# Altium PCB Keypadmacro.PcbDoc
Units mm, origin at the board's own origin, x right, y up, seen from the top; angles counter-clockwise.
Board outline 70 x 90 mm, 2 copper layers (F.Cu, B.Cu), stack 1.671 mm thick; 114 components, 136 nets, 512 pads, 5 vias.
Unrouted connection lines stored in the file: 245.
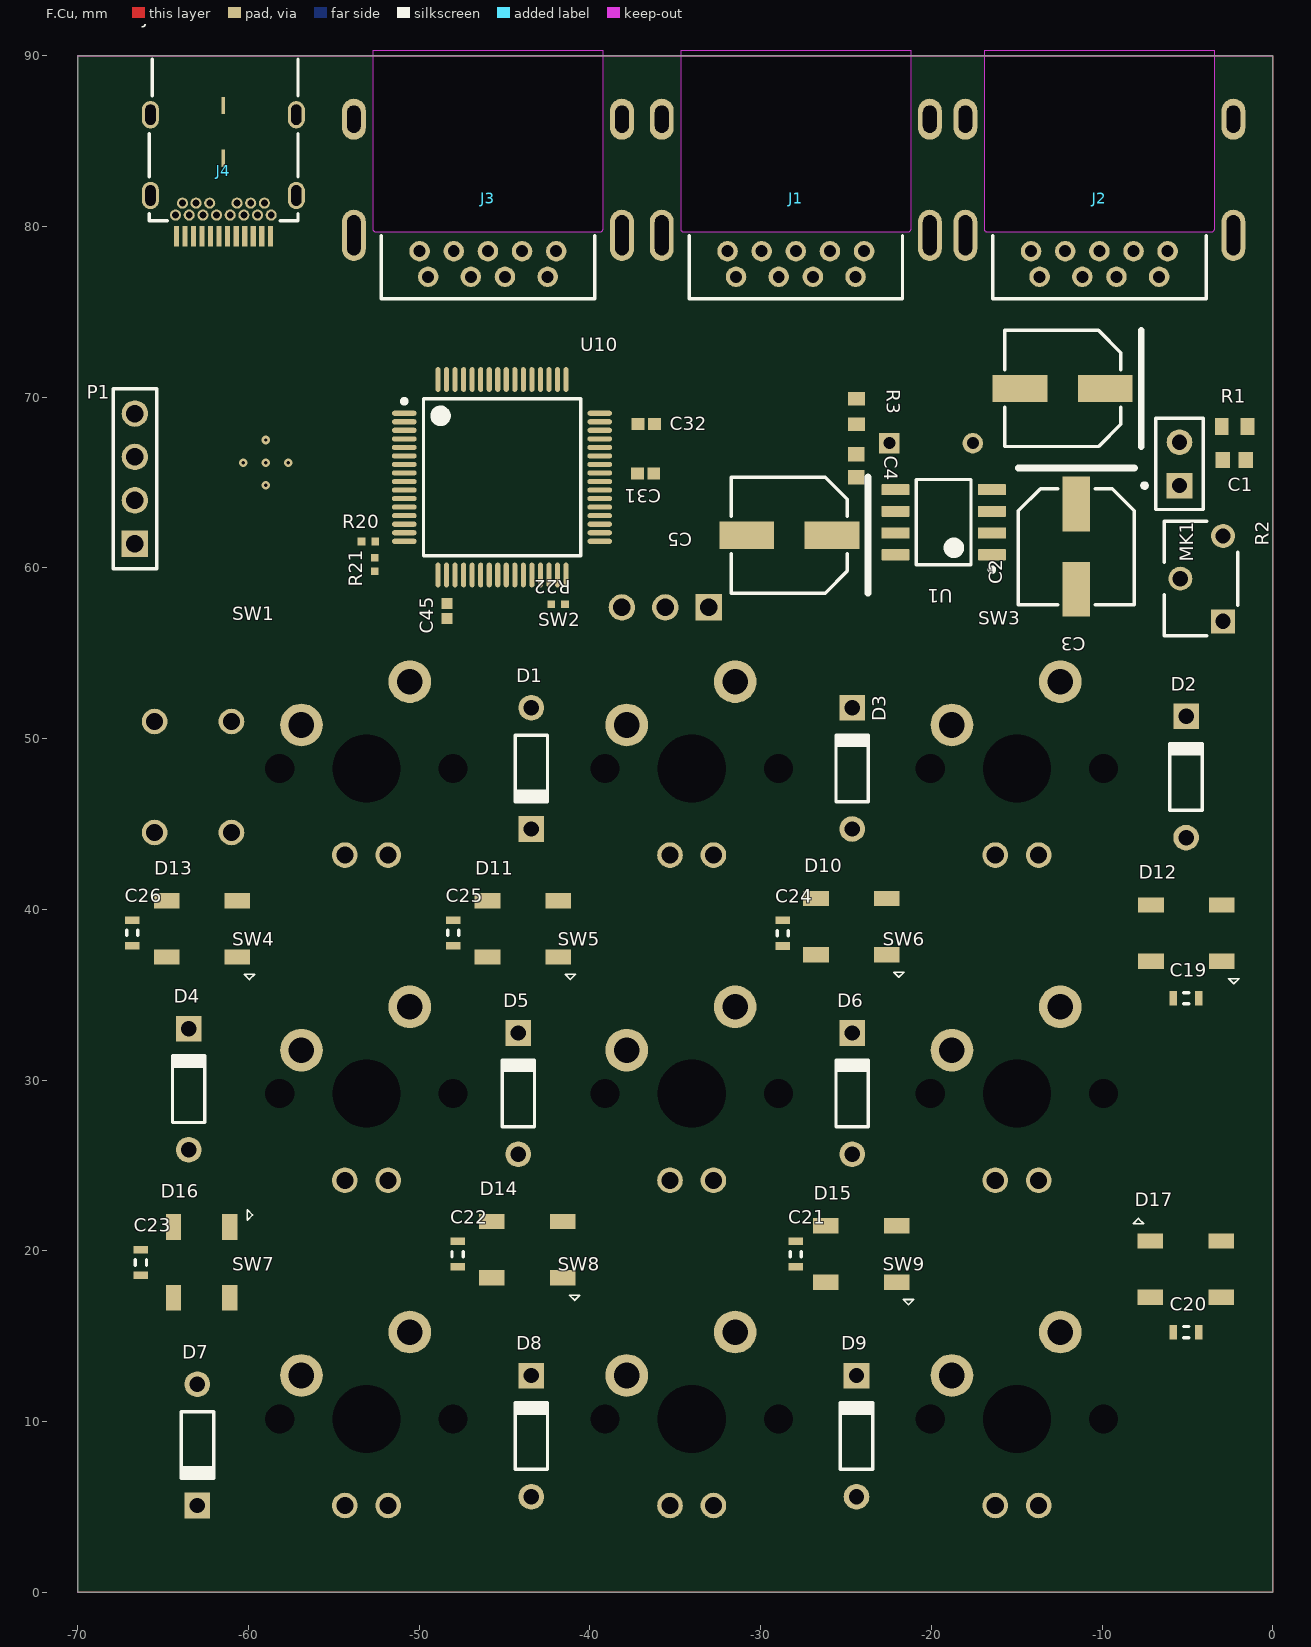
[diagram p0: F.Cu view]
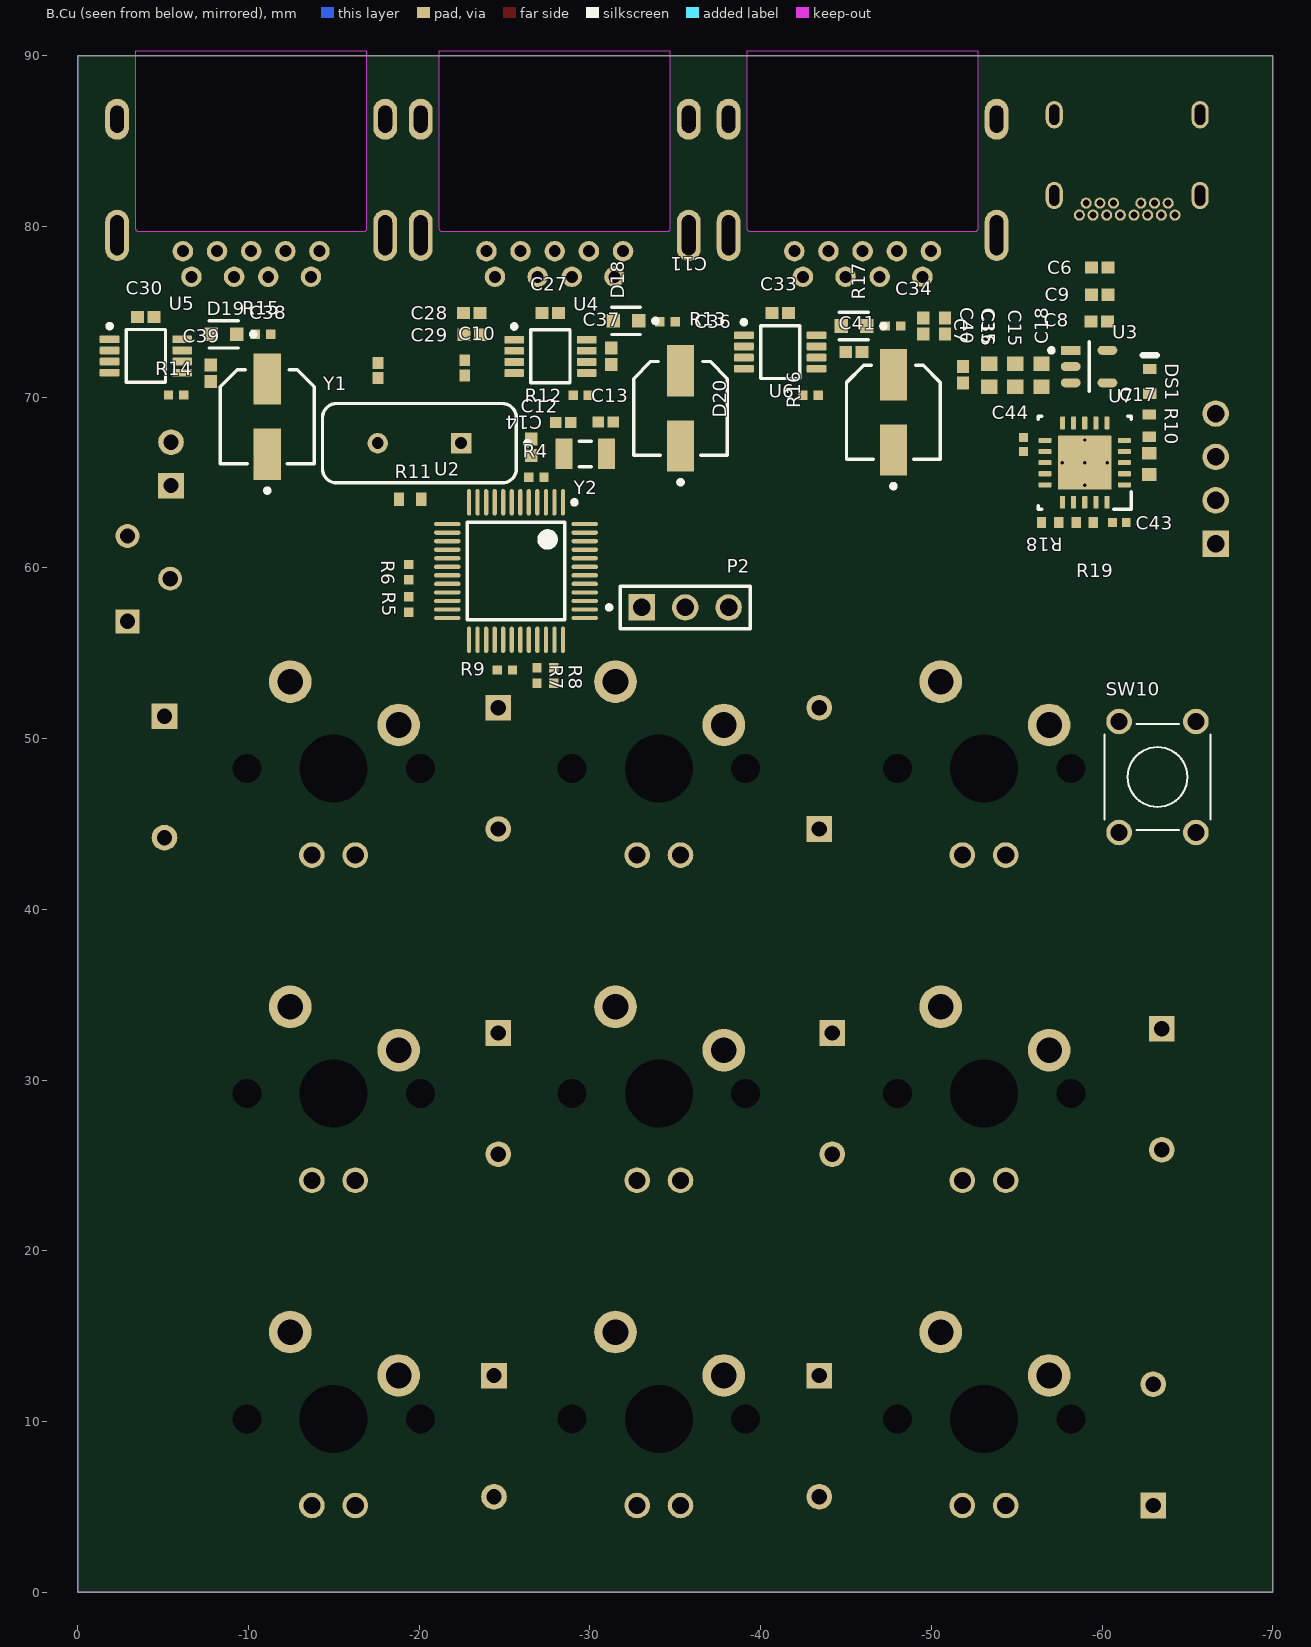
[diagram p1: B.Cu view, seen from below]

## Layer stack, top to bottom
F.Mask: solder mask 0.0102, Solder Resist, Dk 3.5
F.Cu: signal copper 0.0356
Dielectric 1: dielectric 1.6, FR-4, Dk 4.8
B.Cu: signal copper 0.0356
B.Mask: solder mask 0.0102, Solder Resist, Dk 3.5

## Board outline
-70,0 -70,90 0,90 0,0 -70,0

## Design rules (kind name [scope] priority, off if disabled: settings)
Clearance "Clearence 0.2_NetClass" [InNetClass('Default')] p1: gap=0.2 ignorepadtopadclearanceinfootprint=FALSE
HoleSize "Hole Size (Default)" [All] p1: absolutevalues=TRUE maxlimit=10 minlimit=0.3 maxpercent=80.000 minpercent=20.000
MinimumSolderMaskSliver [All] p1: minsoldermaskwidth=0
PolygonConnect [All] p1: connectstyle=Direct reliefconductorwidth=0.254 reliefentries=4 polygonreliefangle="90 Angle" airgapwidth=0.254
RoutingVias [All] p1: holewidth=0.711 width=1.27 viastyle="Through Hole" minholewidth=0.711 minwidth=1.27 maxholewidth=0.711 maxwidth=1.27
SilkToSilkClearance [All] p1: silktosilkclearance=0
SilkToSolderMaskClearance [IsPad] p1: minsilkscreentomaskgap=0 clearancetoexposedcopper=TRUE
SolderMaskExpansion [All] p1: expansion=0.102 istentingtop=FALSE
Width [All] p1: maxlimit=0.254 minlimit=0.254 preferedwidth=0.254
26 further rules are at their usual default settings.

## Classes and differential pairs
component class USB_IC: C45 R20 R21 R22 U10
component class USB_HUB: C27 C28 C29 C30 C31 C32 C33 C34 C35 C36 C37 C38 C39 C40 C41 D18 D19 D20 J1 J2 J3 R12 R13 R14 R15 R16 R17 U4 U5 U6
component class STM: C6 C7 C8 C9 C10 C11 C12 C13 C14 R4 R5 R6 R7 R8 R9 SW10 U2 Y1 Y2
component class LED: C19 C20 C21 C22 C23 C24 C25 C26 D10 D11 D12 D13 D14 D15 D16 D17 R11
component class Designator: D1 D2 D3 D4 D5 D6 D7 D8 D9 SW1 SW2 SW3 SW4 SW5 SW6 SW7 SW8 SW9
component class 3V3: C15 C16 C17 C18 C43 C44 DS1 R10 R18 R19 U3 U7
component class Sound: C1 C2 C3 C4 C5 MK1 R1 R2 R3 U1
component class Keypadmacro: J4 P1 P2

## Components (designator, comment, footprint, x,y, rotation, side; value= is the part's Value field where it differs from the comment)
C1 "GRM188R60J106ME47D" CAPC1608X90X35NL10T15 -2.266,66.313 r0 top
C2 "EEEFP1V470AP" PNSC-FP-V-D_V -12.311,70.509 r180 top
C3 "EEEFP1V470AP" PNSC-FP-V-D_V -11.508,61.245 r270 top
C4 "GRM188R60J106ME47D" CAPC1608X90X35NL10T15 -24.404,65.981 r270 top
C5 "EEEFP1V470AP" PNSC-FP-V-D_V -28.319,61.918 r180 top
C6 "10uF 0402" CAPC1005X55X30ML05T10 -59.867,77.591 r0 bottom
C7 "10uF 0402" CAPC1005X55X30ML05T10 -51.855,71.31 r90 bottom
C8 "10uF 0402" CAPC1005X55X30ML05T10 -59.831,74.439 r0 bottom
C9 "10uF 0402" CAPC1005X55X30ML05T10 -59.853,76.008 r0 bottom
C10 "20pF" CAPC1005X56X25NL10T15 -22.671,71.712 r270 bottom
C11 "20pF" CAPC1005X56X25NL10T15 -17.579,71.564 r270 bottom
C12 "10uF 0402" CAPC1005X55X30ML05T10 -26.571,67.058 r270 bottom
C13 "20pF" CAPC1005X56X25NL10T15 -30.919,68.536 r0 bottom
C14 "20pF" CAPC1005X56X25NL10T15 -28.432,68.526 r180 bottom
C15 "10uF" CAPC1608X90X35NL10T15 -54.919,71.285 r90 bottom
C16 "10uF" CAPC1608X90X35NL10T15 -53.395,71.285 r90 bottom
C17 "1uF" CAPC1608X90X35LL10T15 -62.762,66.092 r90 bottom
C18 "10uF" CAPC1608X90X35NL10T15 -56.443,71.285 r90 bottom
C19 "100nF" CAPC1608X90X20LL10 -5.08,34.798 r180 top
C20 "100nF" CAPC1608X90X20LL10 -5.08,15.24 r0 top
C21 "100nF" CAPC1608X90X20LL10 -27.94,19.812 r90 top
C22 "100nF" CAPC1608X90X20LL10 -47.752,19.812 r90 top
C23 "100nF" CAPC1608X90X20LL10 -66.294,19.316 r270 top
C24 "100nF" CAPC1608X90X20LL10 -28.702,38.608 r90 top
C25 "100nF" CAPC1608X90X20LL10 -48.006,38.62 r90 top
C26 "100nF" CAPC1608X90X20LL10 -66.802,38.62 r90 top
C27 "0.1uF" CAPC1005X55X30ML05T10 -27.686,74.93 r180 bottom
C28 "0.1uF" CAPC1005X55X30ML05T10 -23.086,74.93 r0 bottom
C29 "0.1uF" CAPC1005X55X30ML05T10 -23.114,73.66 r0 bottom
C30 "0.1uF" CAPC1005X55X30ML05T10 -3.989,74.699 r180 bottom
C31 "0.1uF" CAPC1005X55X30ML05T10 -36.74,65.534 r180 top
C32 "0.1uF" CAPC1005X55X30ML05T10 -36.706,68.431 r180 top
C33 "0.1uF" CAPC1005X55X30ML05T10 -41.148,74.93 r0 bottom
C34 "0.1uF" CAPC1005X55X30ML05T10 -49.53,74.168 r270 bottom
C35 "0.1uF" CAPC1005X55X30ML05T10 -50.8,74.168 r270 bottom
C36 "150uF" FP-SVPEB6-MFG -35.306,69.342 r90 bottom
C37 "0.1uF 0402" CAPC1005X55X30ML05T10 -31.242,72.39 r90 bottom
C38 "150uF" FP-SVPEB6-MFG -11.101,68.857 r90 bottom
C39 "0.1uF 0402" CAPC1005X55X30ML05T10 -7.799,71.397 r90 bottom
C40 "150uF" FP-SVPEB6-MFG -47.779,69.112 r90 bottom
C41 "0.1uF 0402" CAPC1005X55X30ML05T10 -45.466,72.644 r0 bottom
C43 "10uF" CAPC0402(1005)60_L -61.015,62.649 r180 bottom
C44 "CAP 10uF 4V 0402(1005)" CAPC0402(1005)60_L -55.391,67.229 r90 bottom value=10uF
C45 "GRM155R61A105KE15D" CAPC1005X55X25NL05T10 -48.369,57.481 r90 top
D1 "Diode 1N4148" DO-35 -43.434,48.26 r270 top
D2 "Diode 1N4148" DO-35 -5.08,47.752 r90 top
D3 "Diode 1N4148" DO-35 -24.638,48.26 r90 top
D4 "Diode 1N4148" DO-35 -63.5,29.464 r90 top
D5 "Diode 1N4148" DO-35 -44.196,29.21 r90 top
D6 "Diode 1N4148" DO-35 -24.638,29.21 r90 top
D7 "Diode 1N4148" DO-35 -62.992,8.636 r270 top
D8 "Diode 1N4148" DO-35 -43.434,9.144 r90 top
D9 "Diode 1N4148" DO-35 -24.384,9.144 r90 top
D10 "WS2182B ADD LED 3.3V-5V" WS2182B -24.698,38.987 r0 top
D11 "WS2182B ADD LED 3.3V-5V" WS2182B -43.942,38.862 r0 top
D12 "WS2182B ADD LED 3.3V-5V" WS2182B -5.08,38.608 r0 top
D13 "WS2182B ADD LED 3.3V-5V" WS2182B -62.738,38.862 r0 top
D14 "WS2182B ADD LED 3.3V-5V" WS2182B -43.688,20.066 r0 top
D15 "WS2182B ADD LED 3.3V-5V" WS2182B -24.13,19.812 r0 top
D16 "WS2182B ADD LED 3.3V-5V" WS2182B -62.738,19.304 r90 top
D17 "WS2182B ADD LED 3.3V-5V" WS2182B -5.08,18.925 r180 top
D18 "LTST-C190GKT" FP-LTST-C190GKT-MFG -32.115,74.469 r0 bottom
D19 "LTST-C190GKT" FP-LTST-C190GKT-MFG -8.561,73.683 r0 bottom
D20 "LTST-C190GKT" FP-LTST-C190GKT-MFG -45.466,74.168 r0 bottom
DS1 "TLMS1000-GS08" VISH-TLMS1000_V -62.783,70.93 r90 bottom
J1 "692121130100" 692121130100 -27.94,83.695 r180 top
J2 "692121130100" 692121130100 -10.16,83.695 r180 top
J3 "692121130100" 692121130100 -45.974,83.695 r180 top
J4 "632723300011" 632723300011 -61.468,85.344 r180 top
MK1 "Mic2" PIN2 -5.466,64.823 r90 top
P1 "TSW-104-08-T-S" SMTC-TSW-104-08-X-S -66.652,61.419 r90 top
P2 "22-28-4033" MOLX-22-28-4033_V -35.584,57.685 r180 bottom
R1 "RT0603DRE0710KL" RESC1608X55X25ML10T15 -2.236,68.272 r0 top
R2 "PV37W101C01B00" FP-PV37W101C01B00-MFG -4.215,59.371 r270 top
R3 "RT0603DRE0710KL" RESC1608X55X25ML10T15 -24.373,69.155 r270 top
R4 "10K" RESC1005X40X25NL05T05 -26.863,65.321 r180 bottom
R5 "10K" RESC1005X40X25NL05T05 -19.393,57.855 r270 bottom
R6 "10K" RESC1005X40X25NL05T05 -19.385,59.747 r90 bottom
R7 "10K" RESC1005X40X25NL05T05 -26.9,53.693 r270 bottom
R8 "100R" RESC1005X40X25NL05T05 -27.89,53.7 r270 bottom
R9 "100R" RESC1005X40X25NL05T05 -25.013,54.022 r0 bottom
R10 "470R" RESC1608X55X25LL10T15 -62.767,68.335 r90 bottom
R11 "100R" RESC1608X55X25LL10T15 -19.475,64.017 r0 bottom
R12 "CRCW040210K0FKED" RESC1005X40X25NL05T05 -29.464,70.104 r0 bottom
R13 "CRCW0402330RFKED" RESC1005X40X25NL05T05 -34.544,74.422 r0 bottom
R14 "CRCW040210K0FKED" RESC1005X40X25NL05T05 -5.767,70.127 r0 bottom
R15 "CRCW0402330RFKED" RESC1005X40X25NL05T05 -10.847,73.683 r0 bottom
R16 "CRCW040210K0FKED" RESC1005X40X25NL05T05 -42.926,70.104 r0 bottom
R17 "CRCW0402330RFKED" RESC1005X40X25NL05T05 -47.752,74.168 r0 bottom
R18 "4.99K" RESC0402(1005)_N -56.951,62.649 r0 bottom value="0.00 Ohm"
R19 "1.87K" RESC0402(1005)_N -58.975,62.649 r0 bottom value="0.00 Ohm"
R20 "ERJ2RKF1002X" RESC1005X40X25LL05T05 -52.976,61.548 r180 top
R21 "ERJ2RKF1002X" RESC1005X40X25LL05T05 -52.608,60.202 r90 top
R22 "ERJ2RKF1002X" RESC1005X40X25LL05T05 -41.858,57.875 r0 top
SW1 "Cherry MX with an LED" MX_Cherry_LED -53.086,48.26 r0 top
SW2 "Cherry MX with an LED" MX_Cherry_LED -34.036,48.26 r0 top
SW3 "Cherry MX with an LED" MX_Cherry_LED -14.986,48.26 r0 top
SW4 "Cherry MX with an LED" MX_Cherry_LED -53.086,29.21 r0 top
SW5 "Cherry MX with an LED" MX_Cherry_LED -34.036,29.21 r0 top
SW6 "Cherry MX with an LED" MX_Cherry_LED -14.986,29.21 r0 top
SW7 "Cherry MX with an LED" MX_Cherry_LED -53.086,10.16 r0 top
SW8 "Cherry MX with an LED" MX_Cherry_LED -34.036,10.16 r0 top
SW9 "Cherry MX with an LED" MX_Cherry_LED -14.986,10.16 r0 top
SW10 "430156070736" 430156070736 -63.246,47.752 r270 bottom
U1 "LM386M-1" D0008A_M -19.278,62.677 r180 top
U2 "STM32F103C8T6" STM-LQFP48_L -25.672,59.816 r270 bottom
U3 "MIC5219-3.3YM5-TR" FP-SOT23-5LD-PL-1-IPC_C -59.237,71.793 r180 bottom
U4 "TPS2001CDGKR" DGK0008A_L -27.686,72.39 r180 bottom
U5 "TPS2001CDGKR" DGK0008A_L -3.989,72.413 r180 bottom
U6 "TPS2001CDGKR" DGK0008A_L -41.148,72.644 r180 bottom
U7 "TPS74801RGWT" RGW0020A_V -58.983,66.166 r0 bottom
U10 "TUSB8041-Q1-4port Hub" TSQFP50P1200X1200X120-64N -45.148,65.309 r0 top
Y1 "FOXSLF/080-20" FOX-FOXSLF080-20 -20.014,67.305 r0 bottom
Y2 "ABS07-120-32.768KHZ-T" ABRA-ABS07_A_V -29.73,66.679 r0 bottom

## Footprints (in the part's own frame and the unit in brackets; to place one, negate y for a bottom-side part, rotate by r counter-clockwise, add the part's x,y. Pads: shape width x height; smd on the part's side, far side on the other; paste and mask are expansions set on the pad)
430156070736 [mm] "6*6mm vertical type, THT, height 7.0mm, salmon actuator, 360gf, Bulk"
  round 1.5 hole 1: 1(-3.25,2.25) 2(-3.25,-2.25) 3(3.25,2.25) 4(3.25,-2.25)
  silkscreen extent -3.1,-3.1 3.1,3.1, body extent -3.95,-3.1 3.95,3.1, height 7.01
632723300011 [mm] "USB 3.1 Type C Receptacle Horizontal THR"
  rect 0.3x1.2 smd: A1(-2.75,5.93) A2(-2.25,5.93) A3(-1.75,5.93) A4(-1.25,5.93) A5(-0.75,5.93) A6(-0.25,5.93) A7(0.25,5.93) A8(0.75,5.93) A9(1.25,5.93) A10(1.75,5.93) A11(2.25,5.93) A12(2.75,5.93)
  round 0.65 hole 0.4: B1(2.8,4.68) B2(2.4,3.98) B3(1.6,3.98) B4(1.2,4.68) B5(0.8,3.98) B6(0.4,4.68) B7(-0.4,4.68) B8(-0.8,3.98) B9(-1.2,4.68) B10(-1.6,3.98) B11(-2.4,3.98) B12(-2.8,4.68) G1(2,4.68) G2(-2,4.68)
  oval 1x1.6 hole 0.6 slot 1.2 at 90 deg: Shell(-4.27,3.53) Shell(-4.27,-1.2) Shell(4.27,3.53) Shell(4.27,-1.2)
  rect 0.2x1 smd: Shell(0,1.35) Shell(0,-1.75)
  silkscreen extent -4.37,-4.45 4.34,5, body extent -4.37,-5.6 4.37,6.19, height 3.05
692121130100 [mm] "USB 3.0 Type A Reverse Horizontal w. Offset 0.14mm"
  round 1.2 hole 0.7: 1(3.5,6.645) 2(1,6.645) 3(-1,6.645) 4(-3.5,6.645) 5(-4,5.145) 6(-2,5.145) 7(0,5.145) 8(2,5.145) 9(4,5.145)
  oval 1.4x2.4 hole 0.8 slot 1.6 at 90 deg: Shell(-7.85,-2.585) Shell(7.85,-2.585)
  oval 1.4x3 hole 0.8 slot 2.35 at 90 deg: Shell(-7.85,4.215) Shell(7.85,4.215)
  Edge.Cuts board cut-out: -6.75,-6.585 6.75,-6.585 6.75,3.815 6.735,3.892 6.691,3.956 6.627,4 6.55,4.015 6.55,4.015 -6.55,4.015 -6.627,4 -6.691,3.956 -6.735,3.892 -6.75,3.815 -6.75,3.815
  silkscreen extent -6.25,4.25 6.25,7.94, body extent -8.08,-7.93 8.08,7.94, height 4.03
ABRA-ABS07_A_V [mm] "SMD, 2-Leads, Body 3.2x1.5mm"
  rect 1x1.8 smd: 1(-1.25,0) 2(1.25,0)
  silkscreen extent -0.35,-0.75 0.35,0.75, body extent -1.6,-0.75 1.6,0.75, height 0.9
CAPC0402(1005)60_L [mm] "Chip Capacitor, Body 1.0x0.5mm, Height 0.6mm, IPC High Density"
  rect 0.52x0.52 smd: 1(-0.4,0) 2(0.4,0)
  body extent -0.55,-0.3 0.55,0.3, height 0.6
CAPC1005X55X25NL05T10 [mm] "Chip Capacitor, 2-Leads, Body 1.00x0.50mm, IPC Medium Density"
  rect 0.66x0.62 smd: 1(-0.44,0) 2(0.44,0)
  body extent -0.53,-0.28 0.53,0.27, height 0.55
CAPC1005X55X30ML05T10 [mm] "Chip Capacitor, 2-Leads, Body 1.00x0.50mm, IPC Low Density"
  rect 0.76x0.72 smd: 1(-0.48,0) 2(0.48,0)
  body extent -0.53,-0.28 0.53,0.27, height 0.55
CAPC1005X56X25NL10T15 [mm] "Chip Capacitor, 2-Leads, Body 1.00x0.50mm, IPC Medium Density"
  rect 0.68x0.64 smd: 1(-0.44,0) 2(0.44,0)
  body extent -0.55,-0.3 0.55,0.3, height 0.56
CAPC1608X90X20LL10 [mm] "Chip Capacitor, 2-Leads, Body 1.70x0.90mm, IPC High Density"
  rect 0.45x0.85 smd: 1(-0.75,0) 2(0.75,0)
  silkscreen extent -0.15,-0.33 0.15,0.33, body extent -0.85,-0.45 0.85,0.45, height 0.9
CAPC1608X90X35LL10T15 [mm] "Chip Capacitor, 2-Leads, Body 1.60x0.80mm, IPC High Density"
  rect 0.75x0.85 smd: 1(-0.625,0) 2(0.625,0)
  body extent -0.85,-0.45 0.85,0.45, height 0.9
CAPC1608X90X35NL10T15 [mm] "Chip Capacitor, 2-Leads, Body 1.60x0.80mm, IPC Medium Density"
  rect 0.85x0.95 smd: 1(-0.675,0) 2(0.675,0)
  body extent -0.85,-0.45 0.85,0.45, height 0.9
D0008A_M [mm] "SOIC, 8-Leads, Body 5x4mm, Pitch 1.27mm, IPC Low Density"
  rrect15% 1.65x0.65 smd: 1(-2.825,1.905) 2(-2.825,0.635) 3(-2.825,-0.635) 4(-2.825,-1.905) 5(2.825,-1.905) 6(2.825,-0.635) 7(2.825,0.635) 8(2.825,1.905)
  silkscreen extent -2.95,-2.5 1.6,2.9, body extent -3,-2.45 3,2.45, height 1.63
DGK0008A_L [mm] "TSOP, 8-Leads, Body 3.1x3.1mm, Pitch 0.65mm, IPC High Density"
  rrect22% 1.15x0.45 smd: 1(-2.125,0.975) 2(-2.125,0.325) 3(-2.125,-0.325) 4(-2.125,-0.975) 5(2.125,-0.975) 6(2.125,-0.325) 7(2.125,0.325) 8(2.125,0.975)
  silkscreen extent -2.25,-1.55 1.15,1.87, body extent -2.45,-1.5 2.45,1.5, height 0.94
DO-35 [mm] "Diode, Axial; Body 3.8 x 1.9 mm (LxDia. max), Lead Dia. 0.53 mm (max)"
  round 1.5 hole 0.9: 1(-3.55,0)
  rect 1.5x1.5 hole 0.9: 2(3.55,0)
  silkscreen extent -1.95,-0.95 2.05,0.95
FOX-FOXSLF080-20 [mm] "THD, 2-Leads, Body 11.35x4.65mm"
  rect 1.2x1.2 hole 0.7: 1(-2.44,0)
  round 1.2 hole 0.7: 2(2.44,0)
  silkscreen extent -6.45,-2.33 5.68,2.32, body extent -5.67,-2.32 5.68,2.33, height 3.6
FP-LTST-C190GKT-MFG [mm]
  rect 0.8x0.8 smd paste+0 mask+0: 1(-0.75,0) 2(0.75,0)
  silkscreen extent -1.85,-0.8 0.85,0.8, body extent -0.8,-0.4 0.8,0.4, height 0.8
FP-PV37W101C01B00-MFG [mm]
  rect 1.4x1.4 hole 0.9 paste-1000 mask+0: 1(2.5,1.3)
  round 1.4 hole 0.9 paste-1000 mask+0: 2(0,-1.2) 3(-2.5,1.3)
  silkscreen extent -3.35,-2.15 3.35,2.15, body extent -3.2,-2 3.2,2, height 8.3
FP-SOT23-5LD-PL-1-IPC_C [mm]
  rect 1.156x0.53 smd paste+0 mask+0: 1(-1.075,0.95)
  rrect100% 1.156x0.53 smd paste+0 mask+0: 2(-1.075,0) 3(-1.075,-0.95) 4(1.075,-0.95) 5(1.075,0.95)
  silkscreen extent -2.33,-1.45 0,1.45, body extent -1.4,-1.45 1.4,1.45, height 1.45
FP-SVPEB6-MFG [mm]
  rect 3x1.6 smd paste+0 mask+0: 1(-2.2,0) 2(2.2,0)
  silkscreen extent -4.45,-2.75 2.75,2.75, body extent -3,-2.65 3,2.65, height 6
MOLX-22-28-4033_V [mm] "THD, 3-Leads, Body 7.62x2.49mm, Pitch 2.54mm"
  rect 1.55x1.55 hole 1.02: 1(-2.54,0)
  round 1.55 hole 1.02: 2(0,0) 3(2.54,0)
  silkscreen extent -4.59,-1.24 3.81,1.24, body extent -3.81,-1.24 3.81,1.24, height 8.38
MX_Cherry_LED [mm] "Cherry Key Pad with LED"
  round 2.5 hole 1.5: 1(2.54,5.08) 2(-3.81,2.54)
  round 1.5 hole 1: 3(-1.27,-5.08) 4(1.27,-5.08)
  round 0 hole 1.702: 6(-5.08,0) 6(5.08,0)
  round 0 hole 3.988: Hole(0,0)
  body extent -7.75,-7.8 7.85,7.8, height 14.9
PIN2 [mm] "Photosensitive Diode; 2 Leads"
  rect 1.5x1.5 hole 0.9: 1(0,0)
  round 1.5 hole 0.9: 2(2.54,0)
  silkscreen extent -1.4,-1.4 3.94,2.17
PNSC-FP-V-D_V [mm] "CAPAE, 2-Leads, Body 6.80x6.80mm"
  rect 3.2x1.6 smd: 1(-2.5,0) 2(2.5,0)
  silkscreen extent -4.6,-3.4 3.4,3.4, body extent -3.9,-3.4 3.9,3.4, height 6.1
RESC0402(1005)_N [mm] "Chip Resistor, Body 1.0x0.5mm, IPC Medium Density"
  rect 0.55x0.65 smd: 1(-0.5,0) 2(0.5,0)
  body extent -0.52,-0.27 0.53,0.28, height 0.4
RESC1005X40X25LL05T05 [mm] "Chip Resistor, 2-Leads, Body 1.05x0.55mm, IPC High Density"
  rect 0.45x0.45 smd: 1(-0.4,0) 2(0.4,0)
  body extent -0.52,-0.27 0.52,0.28, height 0.4
RESC1005X40X25NL05T05 [mm] "Chip Resistor, 2-Leads, Body 1.00x0.50mm, IPC Medium Density"
  rect 0.55x0.55 smd: 1(-0.45,0) 2(0.45,0)
  body extent -0.53,-0.27 0.53,0.28, height 0.4
RESC1608X55X25LL10T15 [mm] "Chip Resistor, 2-Leads, Body 1.70x0.90mm, IPC High Density"
  rect 0.6x0.8 smd: 1(-0.65,0) 2(0.65,0)
  body extent -0.85,-0.45 0.85,0.45, height 0.55
RESC1608X55X25ML10T15 [mm] "Chip Resistor, 2-Leads, Body 1.60x0.80mm, IPC Low Density"
  rect 0.8x1 smd: 1(-0.75,0) 2(0.75,0)
  body extent -0.85,-0.45 0.85,0.45, height 0.55
RGW0020A_V [mm] "QFN, 20-Leads, Body 5x5mm, Pitch 0.65mm, Thermal Pad 3.15x3.15mm, TI Recommended"
  rrect33% 0.75x0.3 smd: 1(-2.325,1.3) 2(-2.325,0.65) 3(-2.325,0) 4(-2.325,-0.65) 5(-2.325,-1.3) 11(2.325,-1.3) 12(2.325,-0.65) 13(2.325,0) 14(2.325,0.65) 15(2.325,1.3)
  rrect33% 0.3x0.75 smd: 6(-1.3,-2.325) 7(-0.65,-2.325) 8(0,-2.325) 9(0.65,-2.325) 10(1.3,-2.325) 16(1.3,2.325) 17(0.65,2.325) 18(0,2.325) 19(-0.65,2.325) 20(-1.3,2.325)
  rrect3% 3.15x3.15 smd paste-1.575: 21(0,0)
  silkscreen extent -2.73,-2.73 2.73,2.73, body extent -2.58,-2.57 2.57,2.58, height 1.01
SMTC-TSW-104-08-X-S [mm] ".025 SQ Post Terminal Strip Assembly, 1x4 Pins, Vertical, 2.54mm Pitch, Male"
  rect 1.55x1.55 hole 1.02: 1(0,0)
  round 1.55 hole 1.02: 2(2.54,0) 3(5.08,0) 4(7.62,0)
  silkscreen extent -1.46,-1.27 9.08,1.27
STM-LQFP48_L [mm] "QFP, 48-Leads, Body 7x7mm, Pitch 0.5mm, IPC High Density"
  oval 1.55x0.25 smd: 1(-4.025,2.75) 2(-4.025,2.25) 3(-4.025,1.75) 4(-4.025,1.25) 5(-4.025,0.75) 6(-4.025,0.25) 7(-4.025,-0.25) 8(-4.025,-0.75) 9(-4.025,-1.25) 10(-4.025,-1.75) 11(-4.025,-2.25) 12(-4.025,-2.75) 25(4.025,-2.75) 26(4.025,-2.25) 27(4.025,-1.75) 28(4.025,-1.25) 29(4.025,-0.75) 30(4.025,-0.25) 31(4.025,0.25) 32(4.025,0.75) 33(4.025,1.25) 34(4.025,1.75) 35(4.025,2.25) 36(4.025,2.75)
  oval 0.25x1.55 smd: 13(-2.75,-4.025) 14(-2.25,-4.025) 15(-1.75,-4.025) 16(-1.25,-4.025) 17(-0.75,-4.025) 18(-0.25,-4.025) 19(0.25,-4.025) 20(0.75,-4.025) 21(1.25,-4.025) 22(1.75,-4.025) 23(2.25,-4.025) 24(2.75,-4.025) 37(2.75,4.025) 38(2.25,4.025) 39(1.75,4.025) 40(1.25,4.025) 41(0.75,4.025) 42(0.25,4.025) 43(-0.25,4.025) 44(-0.75,4.025) 45(-1.25,4.025) 46(-1.75,4.025) 47(-2.25,4.025) 48(-2.75,4.025)
  silkscreen extent -4.15,-2.85 2.85,3.55, body extent -3.5,-3.5 3.5,3.5, height 1.6
TSQFP50P1200X1200X120-64N [mm] "TSQFP, 64-Leads, Body 10,00x10,00mm, Pitch 0,50mm, IPC Medium Density"
  oval 1.45x0.3 smd: 1(-5.725,3.75) 2(-5.725,3.25) 3(-5.725,2.75) 4(-5.725,2.25) 5(-5.725,1.75) 6(-5.725,1.25) 7(-5.725,0.75) 8(-5.725,0.25) 9(-5.725,-0.25) 10(-5.725,-0.75) 11(-5.725,-1.25) 12(-5.725,-1.75) 13(-5.725,-2.25) 14(-5.725,-2.75) 15(-5.725,-3.25) 16(-5.725,-3.75) 33(5.725,-3.75) 34(5.725,-3.25) 35(5.725,-2.75) 36(5.725,-2.25) 37(5.725,-1.75) 38(5.725,-1.25) 39(5.725,-0.75) 40(5.725,-0.25) 41(5.725,0.25) 42(5.725,0.75) 43(5.725,1.25) 44(5.725,1.75) 45(5.725,2.25) 46(5.725,2.75) 47(5.725,3.25) 48(5.725,3.75)
  oval 0.3x1.45 smd: 17(-3.75,-5.725) 18(-3.25,-5.725) 19(-2.75,-5.725) 20(-2.25,-5.725) 21(-1.75,-5.725) 22(-1.25,-5.725) 23(-0.75,-5.725) 24(-0.25,-5.725) 25(0.25,-5.725) 26(0.75,-5.725) 27(1.25,-5.725) 28(1.75,-5.725) 29(2.25,-5.725) 30(2.75,-5.725) 31(3.25,-5.725) 32(3.75,-5.725) 49(3.75,5.725) 50(3.25,5.725) 51(2.75,5.725) 52(2.25,5.725) 53(1.75,5.725) 54(1.25,5.725) 55(0.75,5.725) 56(0.25,5.725) 57(-0.25,5.725) 58(-0.75,5.725) 59(-1.25,5.725) 60(-1.75,5.725) 61(-2.25,5.725) 62(-2.75,5.725) 63(-3.25,5.725) 64(-3.75,5.725)
  silkscreen extent -5.85,-4.6 4.6,4.6, body extent -6.07,-6.07 6.07,6.07, height 1.6
VISH-TLMS1000_V [mm] "SMD, 2-Leads, Body 0.8x1.6mm"
  rect 0.6x0.8 smd: 1(-0.725,0) 2(0.725,0)
  silkscreen extent 1.52,-0.4 1.52,0.4, body extent -0.8,-0.4 0.8,0.4, height 0.65
WS2182B [mm]
  rect 1.5x0.9 smd: 1(-2.058,1.651) 2(-2.058,-1.649) 3(2.092,-1.649) 4(2.092,1.651)
  silkscreen extent 2.49,-2.97 3.1,-2.67, body extent -2.68,-2.47 2.68,2.47, height 1.7

## Part data
C1 C4: library part CMP-2006-02792-1, Manufacturer=Murata, Part Number=GRM188R60J106ME47D
C2 C3 C5: library part CMP-2000-06216-1, "Aluminum Electrolytic Capacitor, 47 uF, +/- 20%, 35 V, 2-Pin SMD (Size Code D), -55 to 105 degC, RoHS, Tape and Reel", Capacitance=47µF, Case Size/Dimension=Ø6.3x5.8mm, ESR (Equivalent Series Resistance)=0.26O, Lifetime@Temperature=2000Hrs@105°C, Manufacturer=Panasonic, Operating Temp Range=-55to+105°C, Operating Temp-Max=105°C, Package Description="2-Pin Electrolytic Aluminum Capacitor, Body 6.6 x 6.6 mm", Package Reference=FP-V-D, Rated Voltage=35V, Ripple Current=300mA, Datasheet URL=http://industrial.panasonic.com/cdbs/www-data/pdf/RDE0000/ABA0000C1184.pdf, Datasheet Version=03/2016, Manufacturer URL=http://www.panasonic.com/, Mounting Technology=SurfaceMount, Package URL=http://industrial.panasonic.com/cdbs/www-data/pdf/RDE0000/DME0000COL48.pdf, Series=FP, Type=Can
C6 C7 C8 C9 C12 C27 C28 C29 C30 C31 C32 C33 C34 C35 C37 C39 C41: library part CMP-2008-03080-1, Manufacturer=Kemet, Part Number=C0402C104J4RACTU
C10 C11 C13 C14: library part CMP-2008-02607-1, Manufacturer="AVX Interconnect / Elco", Part Number=04025A200JAT2A
C15 C16 C18: library part CMP-2006-02792-1, Manufacturer=Murata, Part Number=GRM188R60J106ME47D
C17: library part CMP-2006-02459-1, Manufacturer=Murata, Part Number=GRM188R61E105KA12D
C19 C20 C21 C22 C23 C24 C25 C26: library part CMP-2000-07546-1, "Chip Capacitor, 0.1 uF, +/- 10%, 50 V, -55 to 125 degC, 0603 (1608 Metric), RoHS, Tape and Reel", Case Code (Imperial)=0603, Case Code (Metric)=1608, Dielectric=X7R, Manufacturer=TDK, Max Operating Temperature=125degC, Min Operating Temperature=-55degC, Package Description="2-Pin Surface Mount Device, Body 1.6 x 0.8 mm", Package Quantity=1, Package Reference=603, Tolerance=10%, Voltage=50V, Capacitance=100nF, Case/Package=0603, Composition=Ceramic, Datasheet URL=https://product.tdk.com/info/en/catalog/datasheets/mlcc_automotive_general_en.pdf, Datasheet Version=12/2014, Depth=0.8mm, Height=0.8mm, Lead Free=LeadFree, Length=1.6mm, Manufacturer URL=http://www.tdk.com/, Mount=SurfaceMount, Mounting Technology=SurfaceMount, Packaging=TapeandReel, Radiation Hardening=No, REACH SVHC=NoSVHC, RoHSCompliant=True, Termination=SMD/SMT, Thickness=0.035inch, Voltage Rating=50V, Voltage Rating (DC)=50V, Weight=7.1E-05oz, Width=0.8mm
C36 C38 C40: library part CMP-05428-000017-1, "CAP ALUM POLY 150UF 20% 6.3V SMD", Case/Package=Radial, ESR (Equivalent Series Resistance)=12mR, Leakage Current=500uA, Max Operating Temperature=105°C, Min Operating Temperature=-55°C, Package Quantity=1500, Ripple Current=3.52A, Tolerance=20%, Voltage=6.3V, Capacitance=150uF, Diameter=5mm, Dissipation Factor=12%, Height=5.9mm, Height - Seated (Max)=0.236inch, Lead Free="Lead Free", Length=5.9mm, Life (Hours)=2000Hour, Mount="Surface Mount", Number of Pins=6, Packaging="Tape and Reel", Polarity=Polar, REACH SVHC="No SVHC", Ripple Current (AC)=3.52A, Termination=SMD/SMT, Voltage Rating=6.3V, Voltage Rating (DC)=6.3V
C43 C44: library part CMP-1034-02139-1, "CAP 10uF 4V ±20% 0402 (1005 Metric) Thickness 0.6mm SMD", Case-EIA=0402, Case-Metric=1005, Rated Voltage="4 V", Tolerance=Â±20%, Max Thickness="0.6 mm", Technology=SMT
C45: library part CMP-2008-04556-1, Manufacturer=Murata, Part Number=GRM155R61A105KE15D
D1 D2 D3 D4 D5 D6 D7 D8 D9: "High Conductance Fast Diode", Code_JEDEC=DO-204-AH, ComponentLink1Description="Manufacturer Link", ComponentLink1URL=http://www.fairchildsemi.com/, ComponentLink2Description=Datasheet, ComponentLink2URL=http://www.fairchildsemi.com/ds/1N%2F1N4148.pdf, DatasheetVersion=1997, LatestRevisionDate=17-Jul-2002, LatestRevisionNote="Re-released for DXP Platform.", PackageDescription="Diode, Axial; Body 3.8 x 1.9 mm (LxDia. max), Lead Dia. 0.53 mm (max)", PackageReference=DO-35, Published=8-Jun-2000, Publisher="Altium Limited"
D10 D11 D12 D13 D14 D15 D16 D17: library part WS2182B
D18 D19 D20: library part CMP-22017-000005-1, "LED GREEN CLEAR CHIP SMD", Case Code (Imperial)=0603, Case Code (Metric)=1608, Color=Green, Forward Current=30mA, Forward Voltage=2.1V, Lens Color=Colorless, Max Operating Temperature=85°C, Min Operating Temperature=-55°C, Package Quantity=1, Power Dissipation=100mW, Reverse Voltage=5V, Test Current=10mA, Voltage=2V, Case/Package=0603, Depth=0.8mm, Dominant Wavelength=569nm, Height=0.8mm, Illumination Color=Green, Lead Free="Lead Free", Length=1.6mm, Lens Style=Clear, Lens Transparency=Clear, Luminous Intensity=6mcd, Mount="Surface Mount", Number of Elements=1, Number of LEDs=1, Number of Pins=2, Packaging="Tape and Reel", Power Rating=100mW, Radiation Hardening=No, Viewing Angle=130°, Wavelength=565nm, Width=0.8mm
DS1: library part CMP-2000-07254-1, "Low Current LED, 40 mW, 1.8 V, -40 to 100 degC, 2-Pin SMD (0603), RoHS, Tape and Reel", Forward Current If=2mA, Forward Voltage=1.8V, LED Colour=Red, Manufacturer=Vishay, Package Description="2-Pin Surface Mount Device, Body 1.6 x 0.8 mm", Package Reference=TLMS1000, Automotive Qualification Standard=AEC-Q100, Bulb Size=1.6mmx0.8mm, Datasheet URL=https://datasheet.ciiva.com/5798/1698881-5798337.pdf, Datasheet Version="Rev. 1.7, 02/2011", LED Mounting=SMD, Lens Shape=Rectangular, Luminous Intensity=4mcd, Manufacturer URL=http://www.vishay.com/, Mounting Technology=SurfaceMount, MSL=MSL2-1year, Packaging=CutTape, Product Range=-, SVHC=ToBeAdvised, Viewing Angle=80°, Wavelength Typ=636nm
J1 J2 J3: library part CMP-1502-03218-1, "USB 3.0 Type A Receptacle WR-COM, Reverse Horizontal, SMT / THT, with Clips, with 0.14 mm Offset", Contact Resistance=50mOhm, Manufacturer="Wurth Elektronik", Operating Temperature=-20to85degC, Rated Current=0.25A, Working Voltage=30VAC, Connector Type=USB3.0TypeA, Datasheet URL=https://katalog.we-online.de/em/datasheet/692121130100.pdf, Gender=Receptacle, Manufacturer URL=http://www.we-online.de, Mounting Technology=SMT/THT, Orientation=ReverseHorizontal, Package Reference=692121130100, Packaging=TapeandReel, Part Number=692121130100, Publisher=WurthElektronik
J4: library part CMP-1502-03214-1, "USB 3.1 Type C Receptacle WR-COM, Horizontal, SMT / THT", Contact Resistance=30mOhm, Manufacturer="Wurth Elektronik", Operating Temperature=-40to105degC, Rated Current=5A, Working Voltage=20VDC, Connector Type=USB3.1TypeC, Datasheet URL=https://katalog.we-online.de/em/datasheet/632723x00011%282%29.pdf, Gender=Receptacle, Manufacturer URL=http://www.we-online.de, Mounting Technology=SMT/THT, Orientation=Horizontal, Package Reference=632723300011, Packaging=TapeandReel, Part Number=632723300011, Publisher=WurthElektronik
MK1: "Microphone", LatestRevisionDate=17-Jul-2002, LatestRevisionNote="Re-released for DXP Platform.", PackageReference=PIN2, Published=24-Mar-1999, Publisher="Altium Limited"
P1: library part CMP-1024-00356-1, "0.025\" SQ Post Header, Through-hole, Vertical, -55 to 105 degC, 2.54 mm Pitch, 4-Pin, Male, RoHS", Manufacturer=Samtec, Temperature Range="-55 to 105 degC", ComponentLink1Description="Manufacturer URL", ComponentLink1URL=http://www.samtec.com, ComponentLink2Description=Datasheet, ComponentLink2URL=http://www.samtec.com/documents/webfiles/pdf/TSW_TH.PDF, ComponentLink3Description="Package Specification", ComponentLink3URL=http://www.samtec.com/documents/webfiles/cpdf/TSW-XXX-XX-XXX-X-XX-XXX-MKT.pdf, DatasheetVersion=F-214, Mounting Technology=Through-hole, Orientation=Vertical, PackageDescription=".025[0.64] SQ. Post Terminal Strip Assembly", PackageReference=TSW-104-08-X-S, PackageVersion="DM, 8/1988", PartNumber=TSW-104-08-T-S, Pitch="2.54 mm", RoHS=True
P2: library part CMP-1676-00001-5, "Male Header, Pitch 2.54 mm, 1 x 3 Position, Height 8.38 mm, Tail Length 3.18 mm, RoHS, Bulk", Colour=Black, Current Rating="4 A", Manufacturer=Molex, Max Operating Temperature="75 degC", Min Operating Temperature="0 degC", Package Quantity=1, Voltage Rating="250 V", ComponentLink1Description="Manufacturer URL", ComponentLink1URL=http://www.molex.com/, ComponentLink2Description=Datasheet, ComponentLink2URL=http://www.molex.com/pdm_docs/sd/022284033_sd.pdf, Contact Finish=Gold, Contact Material=Brass, Contact Plating=Gold, DatasheetVersion="Rev. G, 01/2012", Height="8.38 mm", Lead Pitch="0.1 inch", Length="7.62 mm", Mount="Through Hole", Mounting Technology="Through Hole", PackageDescription="Male Header, Pitch 2.54 mm, 1 x 3 Position, Height 8.38 mm, Tail Length 3.18 mm", PackageReference=22-28-4033, Packaging=Bulk, Pins=3, REACH SVHC=Unknown, RoHSCompliant=true, Rows=1
R1 R3: library part CMP-2000-04608-1, Manufacturer=Yageo, Part Number=RT0603DRE0710KL
R2: library part CMP-06028-000002-1, "TRIMMER 100 OHM 0.25W PC PIN TOP", Color=Grey, Max Operating Temperature=125°C, Max Power Dissipation=250mW, Min Operating Temperature=-55°C, Package Quantity=50, Resistance=100R, Temperature Coefficient=150ppm/°C, Tolerance=10%, Composition=Cermet, Height=0.264inch, Lead Free="Lead Free", Length=0.252inch, Mount="Through Hole", Number of Turns=12, Packaging=Bulk, Power Rating=250mW, Radiation Hardening=No, Taper=Linear, Termination="PC Pin", Weight=340mg, Width=0.157inch
R4 R5 R6 R7 R8 R9: library part CMP-2002-08523-1, Manufacturer="Vishay Dale", Part Number=CRCW0402330RFKED
R10 R11: library part CMP-1659-00035-1, "General Purpose Chip Resistor, 470 Ohm, +/- 1%, -55 to 155 degC, 0603 (1608 Metric), RoHS, Tape and Reel", Max Operating Temperature="90 degC", Min Operating Temperature="-40 degC", Package Quantity=2500, Resistance="50 Ohm", ComponentLink1Description="Manufacturer URL", ComponentLink1URL=http://www.yageo.com/, ComponentLink2Description=Datasheet, ComponentLink2URL=https://datasheet.ciiva.com/11808/0900766b80f96399-11808177.pdf, Contact Material=Brass, Contact Plating=Gold, DatasheetVersion="Rev. 4, 04/2009", Fastening Type=Snap, Height="1.25 mm", Impedance="50 Ohm", Length="3 mm", Mount="Surface Mount", PackageDescription="2-Pin Surface Mount Device, Body 1.6 x 0.8 mm", PackageReference=0603, Packaging="Tape and Reel", Radiation Hardening=No, RoHSCompliant=true, Width="3.1 mm"
R12 R14 R16: library part CMP-2002-08135-1, Manufacturer="Vishay Dale", Part Number=CRCW040210K0FKED
R13 R15 R17: library part CMP-2002-08523-1, Manufacturer="Vishay Dale", Part Number=CRCW0402330RFKED
R18 R19: library part CMP-1011-00001-1, "Jumper 0402 (1005 Metric)", Case-EIA=0402, Case-Metric=1005, Power=None, Technology=SMT, Tolerance=None
R20 R21 R22: library part CMP-2000-07588-1, "Chip Resistor, 10 KOhm, +/- 1%, 0.1 W, -55 to 155 degC, 0402 (1005 Metric), RoHS, Tape and Reel", Case Code (Imperial)=0402, Case Code (Metric)=1005, Manufacturer=Panasonic, Max Operating Temperature=155degC, Max Power Dissipation=100mW, Min Operating Temperature=-55degC, Package Description="2-Pin Surface Mount Device, Body 1 x 0.5 mm", Package Quantity=1, Package Reference=402, Resistance=10KOhm, Temperature Coefficient=100ppm\/degreesC, Tolerance=1%, Voltage Rating=50V, Case\/Package=0402, Composition=ThickFilm, Contact Plating=Tin, Datasheet URL=https://industrial.panasonic.com/cdbs/www-data/pdf/RDA0000/AOA0000C304.pdf, Datasheet Version=02/2017, Depth=0.5mm, Height=0.35mm, Lead Free=LeadFree, Length=1mm, Manufacturer URL=http://www.panasonic.com/, Military Standard=Not, Mount=SurfaceMount, Mounting Technology=SurfaceMount, Number of Pins=2, Number of Terminations=2, Packaging=TapeandReel, Power Rating=100mW, Radiation Hardening=No, REACH SVHC=NoSVHC, RoHSCompliant=True, Termination=SMD/SMT, Voltage Rating (DC)=50V, Width=0.02inch
SW1 SW2 SW3 SW4 SW5 SW6 SW7 SW8 SW9: library part MX_Cherry_LED
SW10: library part CMP-1453-00006-1, "WS-TATV THT Tact Switch 6X6 mm", Manufacturer="Wuerth Elektronik", ComponentLink1Description="Manufacturer URL", ComponentLink1URL=http://www.we-online.com, ComponentLink2Description=Datasheet, ComponentLink2URL=http://katalog.we-online.de/em/datasheet/4301x6.pdf, NoPins=04, PackageReference=430156070736, PartNumber=430156070736
U1: library part CMP-0057-00421-3, "Low Voltage Audio Power Amplifier, 8-pin Narrow SOIC", Manufacturer="Texas Instruments", PackageTopMarking=NSZXTT*LM386*M-1, PowerWise=N, Code_IPC=SOIC127P600-8, Code_JEDEC=MS-012-AA, ComponentLink1Description="Datasheet URL", ComponentLink1URL=http://www.ti.com/general/docs/lit/getliterature.tsp?genericPartNumber=LM386&fileType=pdf, CompType="Audio IC", PackageDescription="SOIC Narrow, 4.9 x 3.9 x 1.45mm, 8 Lead, 1.27mm Pitch", PackageReference=D0008A, PinCount=8, RoHS=N
U2: library part CMP-0237-00215-3, "ARM Cortex-M3 32-bit MCU, 64 KB Flash, 20 KB Internal RAM, 37 I/Os, 48-pin LQFP, -40 to 85 degC, Tray", I/Os (High Current)=37, Operating Frequency(F) (Processor speed) (MHz)=72, Supply Voltage(Vcc) min (V)=2, A/D Converter="2x12-bit (10 Channel)", ComponentLink1Description="Manufacturer URL", ComponentLink1URL=http://www.st.com/web/en/home.html, ComponentLink2Description=Datasheet, ComponentLink2URL=http://www.st.com/st-web-ui/static/active/en/resource/technical/document/datasheet/CD00161566.pdf, ComponentLink3Description="Package Specification", ComponentLink3URL=http://www.st.com/st-web-ui/static/active/en/resource/technical/document/datasheet/DM00058181.pdf, Core="ARM Cortex-M3", DatasheetVersion="Rev. 16", FLASH Size (Prog) (kB)=64, Internal RAM Size (kB)=20, Mounting Technology="Surface Mount", PackageDescription="48-Pin Low Profile Quad Flat Package, 7 x 7 mm Body, 0.5 mm Pitch", PackageReference=LQFP48, PackageVersion="Rev. 6, 06/2013", Packing=Tray, PartNumber=STM32F103C8T6
U3: library part CMP-06324-000027-1, "IC REG LINEAR 3.3V 500MA SOT23-5", Case/Package=SOT-23-5, Dropout Voltage=350mV, Max Input Voltage=12V, Max Operating Temperature=125°C, Min Input Voltage=2.5V, Min Operating Temperature=-40°C, Nominal Output Voltage=3.3V, Output Current=500mA, Lead Free="Lead Free", Mount="Surface Mount", Number of Pins=5, Number of Regulators=1, Output Type=Fixed, Output Voltage=3.3V, Packaging="Cut Tape", REACH SVHC="No SVHC"
U4 U5 U6: library part CMP-0337-00297-2, "Single Channel, Current-Limited USB Power Distribution Switch, 2.9 A Current Limit, -40 to 85 degC, 8-pin VSSOP (DGK), Green (RoHS & no Sb/Br)", Continuous Current(Max)(A)=2, Current Limit(A)=2.9, Manufacturer="Texas Instruments", Rating=Catalog, Code_JEDEC=MO-187-AA, ComponentLink1Description=Datasheet, ComponentLink1URL=http://www.ti.com/general/docs/lit/getliterature.tsp?genericPartNumber=TPS2001C&fileType=pdf, DatasheetVersion=SLVSAU6E, Discharge Function=TRUE, Eco-Plan="Green (RoHS & no Sb/Br)", Enable="Active High", Mounting Technology="Surface Mount", Number of Switches=1, PackageDescription="8-Pin Thin Small Outline Package 3 x 3 mm Body ,0.65 mm Pitch", PackageReference=DGK0008A, PackageVersion="revE, May-2006", PartNumber=TPS2001CDGKR, rDS(on) per FET(Typ)(mOhms)=70, UL Listed=TRUE, Vin(Max)(V)=5.5, Vin(Min)(V)=4.5
U7: library part CMP-0395-01394-2, "Single Output LDO, 1.5 A, Adjustable 0.8 to 3.6 V Output, 0.8 to 5.5 V Input, with Programmable Soft Start, 20-pin VQFN (RGW), -40 to 125 degC, Green (RoHS & no Sb/Br)", Manufacturer="Texas Instruments", Power Good=TRUE, Rating=Catalog, Accuracy(%)=2, Code_JEDEC=MO-220, ComponentLink1Description="Manufacturer URL", ComponentLink1URL=http://www.ti.com/, ComponentLink2Description=Datasheet, ComponentLink2URL=http://www.ti.com/general/docs/lit/getliterature.tsp?genericPartNumber=TPS74801&fileType=pdf, ComponentLink3Description="Package Specification", ComponentLink3URL=http://www.ti.com/litv/pdf/mpqf122b, ComponentLink4Description="URL Link1", ComponentLink4URL="Samples URL:http://www.ti.com/product/tps74801#samples", DatasheetVersion=SBVS074J, Eco-Plan="Green (RoHS & no Sb/Br)", Iout(Max)(A)=1.5, Iq(Typ)(mA)=1, Mounting Technology="Surface Mount", PackageDescription="20-Pin Plastic Quad Flat No-Pin, 5 x 5 mm Body, 0.65 mm Pitch, 3.15 x 3.15 mm Exposed Pad", PackageReference=RGW0020A, PartNumber=TPS74801RGWT, SubFamily="Single Channel LDO", Vdo(Typ)(mV)=60, Vin(Max)(V)=5.5, Vin(Min)(V)=0.8, Vout Adj(Max)(V)=3.6, Vout Adj(Min)(V)=0.8
Y1: library part CMP-1749-00002-1, "Resistance Weld Thru-Hole Crystal, 8 MHz, -20 to 70 degC, 2-Pin THD, RoHS, Bulk", Case\Package=TO-263-3, Dropout Voltage="2 V", Max Input Voltage="35 V", Max Operating Temperature="125 degC", Max Ouput Current="1 A", Min Input Voltage="7 V", Min Operating Temperature="0 degC", Nominal Output Voltage="5 V", Package Quantity=50, ComponentLink1Description="Manufacturer URL", ComponentLink1URL=http://www.foxonline.com/, ComponentLink2Description=Datasheet, ComponentLink2URL=http://download.siliconexpert.com/pdfs/2015/4/5/6/5/7/200/fox_/manual/35607121449963728hc49slf.pdf, DatasheetVersion=Mar-15, Height="30.02 mm", Length="10.24 mm", Mount="Surface Mount", Output Current="1 A", Output Voltage="5 V", Outputs=1, PackageDescription="2-Pin Through Hole Device, Body 11.35 x 4.65 mm", PackageReference=FOXSLF080-20, Packaging=Rail/Tube, Pins=3, Radiation Hardening=No, REACH SVHC="No SVHC", RoHSCompliant=true, Width="9.35 mm"
Y2: library part CMP-2000-07587-1, "Tuning Fork Crystal, 32.768 KHz, +/- 20 ppm, -40 to 85 degC, 2-Pin SMD, RoHS, Tape and Reel", Case\/Package=SMD/SMT, ESR (Equivalent Series Resistance)=55KOhm, Frequency=32.768KHz, Frequency Tolerance=20ppm, Load Capacitance=6pF, Manufacturer=Abracon, Max Operating Temperature=85degC, Min Operating Temperature=-40degC, Package Description="2-Pin Surface Mount Device, Body 3.2 x 1.5 mm", Package Quantity=3000, Package Reference=ABS07, Series Resistance=60KOhm, Datasheet URL=http://www.abracon.com/Resonators/ABS07-120-32.768kHz-T.pdf, Datasheet Version=11/2014, Depth=1.5mm, Height=0.035inch, Lead Free=LeadFree, Length=3.2mm, Manufacturer URL=http://www.abracon.com/, Mount=SurfaceMount, Mounting Technology=SurfaceMount, Number of Pins=2, Packaging=TapeandReel, Radiation Hardening=No, REACH SVHC=NoSVHC, RoHSCompliant=True, Termination=SMD/SMT, Tolerance=20ppm, Width=0.061inch

## Via types
v1: diameter 0.5, hole 0.2, F.Cu to B.Cu, 5 vias

## Nets (pads, with @x,y where several pads share a name; then routed paths per layer and width w, separated by ;. In a path a pad name is that pad's centre, name@x,y a point inside that pad or via, vN(x,y) a via of type N, cw(c..) or ccw(c..) an arc to the next point about the centre after c; other vN are vias at no path point)
1V1: C43.1 R19.1 U7.1 U7.18 U7.19 U7.20 U10.19 U10.25 U10.28 U10.37 U10.40 U10.45 U10.53 U10.60 U10.63
3V3: C6.2 C7.2 C8.2 C9.2 C15.2 C16.2 C17.2 C44.2 P1.2 R1.2 R4.2 R5.2 R6.2 R7.2 R10.1 R12.2 R14.2 R16.2 U1.6 U2.1 U2.9 U2.24 U2.36 U2.48 U3.5 U7.5 U7.6 U7.7 U7.10 U7.11 U10.2 U10.20 U10.31 U10.48
+BATT: C18.2 C19.2 C20.2 C21.2 C22.2 C23.2 C24.2 C25.2 C26.2 D10.1 D11.1 D12.1 D13.1 D14.1 D15.1 D16.1 D17.1 J4.A4 J4.A9 J4.B4 J4.B9 P2.1 R20.2 U3.1 U3.3 U4.2 U4.3 U5.2 U5.3 U6.2 U6.3
AUTOENZ: U10.13
BATEN1: U4.4 U10.4
BATEN2: U5.4 U10.3
BATEN3: U6.4 U10.1
BOOT0: U2.44
CC1: J4.A5
CC2: J4.B5
CH_COL1: D3.1 D6.1 D9.1 U2.40
CH_COL2: D2.1 D5.1 D8.1 U2.41
CH_COL3: D1.1 D4.1 D7.1 U2.42
CH_ROW1: SW1.1 SW2.1 SW3.1 U2.18
CH_ROW2: SW4.1 SW5.1 SW6.1 U2.19
CH_ROW3: SW7.1 SW8.1 SW9.1 U2.20
D+: R8.2
D-: R9.2
D_IN: R11.1 U2.11
DIN_EXT: P2.2 U2.12
DM_DN1: J1.2 U10.34
DM_DN2: J2.2 U10.43
DM_DN3: J3.2 U10.49
DP_DN1: J1.3 U10.33
DP_DN2: J2.3 U10.41
DP_DN3: J3.3 U10.54
FULLPWRMGMTZ_SS_UP: U10.8
GANGED_HS_UP: U10.10
GND: C5.2 C6.1 C7.1 C8.1 C9.1 C10.1 C11.1 C12.1 C13.1 C14.1 C15.1 C16.1 C17.1 C18.1 C19.1 C20.1 C21.1 C22.1 C23.1 C24.1 C25.1 C26.1 C27.1 C30.1 C33.1 C36.1 C37.1 C38.1 C39.1 C40.1 C41.1 C43.2 C44.1 C45.1 D10.3 D11.3 D12.3 D13.3 D14.3 D15.3 D16.3 D17.3 DS1.2 J1.4 J1.7 J1.Shell J2.4 J2.7 J2.Shell J3.4 J3.7 J3.Shell J4.A1 J4.A12 J4.B1 J4.B12 J4.G1 J4.G2 J4.Shell MK1.1 P1.1 P2.3 R2.3 R3.1 R13.1 R15.1 R17.1 R18.2 R21.1 R22.1 SW1.4 SW2.4 SW3.4 SW4.4 SW5.4 SW6.4 SW7.4 SW8.4 SW9.4 SW10.1 SW10.3 U1.2 U1.4 U2.8 U2.23 U2.35 U2.47 U3.2 U4.1 U5.1 U6.1 U7.12 U7.21
  other v1: -58.983,64.841 -60.308,66.166 -58.983,66.166 -57.658,66.166 -58.983,67.491
MIC_OUT_TO_CONTROLLER: C2.2 U2.10
NetC1_1: C1.1 MK1.2 R1.1
NetC1_2: C1.2 R2.1
NetC2_1: C2.1 C4.2 U1.5
NetC3_1: C3.1 U1.1
NetC3_2: C3.2 U1.8
NetC4_1: C4.1 R3.2
NetC5_1: C5.1 U1.7
NetC28_1: C28.1 J1.8
NetC29_1: C29.1 J1.9
NetC31_1: C31.1 J2.8
NetC32_1: C32.1 J2.9
NetC34_1: C34.1 J3.8
NetC35_1: C35.1 J3.9
NetC45_2: C45.2 U10.18
NetD1_2: D1.2 SW1.2
NetD2_2: D2.2 SW2.2
NetD3_2: D3.2 SW3.2
NetD4_2: D4.2 SW4.2
NetD5_2: D5.2 SW5.2
NetD6_2: D6.2 SW6.2
NetD7_2: D7.2 SW7.2
NetD8_2: D8.2 SW8.2
NetD9_2: D9.2 SW9.2
NetD10_2: D10.2 D11.4
NetD10_4: D10.4 R11.2
NetD11_2: D11.2 D12.4
NetD12_2: D12.2 D13.4
NetD13_2: D13.2 D14.4
NetD14_2: D14.2 D15.4
NetD15_2: D15.2 D16.4
NetD16_2: D16.2 D17.4
NetD18_1: D18.1 R13.2
NetD19_1: D19.1 R15.2
NetD20_1: D20.1 R17.2
NetDS1_1: DS1.1 R10.2
NetLabel11: J4.A8
NetR2_2: R2.2 U1.3
NetR18_1: R18.1 R19.2 U7.16
NetR20_1: R20.1 R21.2 U10.16
NetR22_2: R22.2 U10.32
OSCIN: C10.2 U2.5 Y1.1
OSCOUT: C11.2 U2.6 Y1.2
OVCUR1: R12.1 U4.5 U10.14
OVCUR2: R14.1 U5.5 U10.15
OVCUR3: R16.1 U6.5 U10.12
OVERCUR4Z: U10.11
PA3: U2.13
PA4: U2.14
PA5: U2.15
PA6: U2.16
PA7: U2.17
PA8: U2.29
PA9_TX: U2.30
PA11: R9.1 U2.32
PA12: R7.1 R8.1 U2.33
PA13_SWDIO: U2.34
PA14_SWCLK: U2.37
PA15: U2.38
PB3_SWO: U2.39
PB7: U2.43
PB8: U2.45
PB9: U2.46
PB12: U2.25
PB13: U2.26
PB14: U2.27
PB15: U2.28
PC13: U2.2
PC14: C13.2 U2.3 Y2.1
PC15: C14.2 U2.4 Y2.2
PWRCTL_POL: U10.9
PWRON4_BATEN4: U10.64
RST: C12.2 R4.1 SW10.2 SW10.4 U2.7
RX_PA10: U2.31
RXM_DN1: J1.5 U10.39
RXM_DN2: J2.5 U10.46
RXM_DN3: J3.5 U10.50
RXP_DN1: J1.6 U10.38
RXP_DN2: J2.6 U10.47
RXP_DN3: J3.6 U10.52
SCL: R5.1 U2.21
SCL_SMBCLK_SSC_DIS: U10.6
SDA: R6.1 U2.22
SDA_SMBDAT_U1U2_DIS: U10.5
SMBUSZ: U10.7
TEST_TRSTZ: U10.17
TXM_DN1: C28.2 U10.36
TXM_DN2: C31.2 U10.42
TXM_DN3: C34.2 U10.51
TXP_DN1: C29.2 U10.35
TXP_DN2: C32.2 U10.44
TXP_DN3: C35.2 U10.55
USB_DM_DN4: U10.57
USB_DM_UP: J4.A7 J4.B7 U10.22
USB_DP_DN4: U10.56
USB_DP_UP: J4.A6 J4.B6 U10.21
USB_SSRXM_DN4: U10.62
USB_SSRXM_UP: J4.A10 J4.B3 U10.27
USB_SSRXP_DN4: U10.61
USB_SSRXP_UP: J4.A11 J4.B2 U10.26
USB_SSTXM_DN4: U10.59
USB_SSTXM_UP: J4.A3 J4.B10 U10.24
USB_SSTXP_DN4: U10.58
USB_SSTXP_UP: J4.A2 J4.B11 U10.23
VBUS_USB1: C27.2 C36.2 C37.2 D18.2 J1.1 U4.6 U4.7 U4.8
VBUS_USB2: C30.2 C38.2 C39.2 D19.2 J2.1 U5.6 U5.7 U5.8
VBUS_USB3: C33.2 C40.2 C41.2 D20.2 J3.1 U6.6 U6.7 U6.8
pads on no net: D17.2 J4.B8 P1.3 P1.4 SW1.3 SW1.6 SW1.Hole SW2.3 SW2.6 SW2.Hole SW3.3 SW3.6 SW3.Hole SW4.3 SW4.6 SW4.Hole SW5.3 SW5.6 SW5.Hole SW6.3 SW6.6 SW6.Hole SW7.3 SW7.6 SW7.Hole SW8.3 SW8.6 SW8.Hole SW9.3 SW9.6 SW9.Hole U3.4 U7.2 U7.3 U7.4 U7.8 U7.9 U7.13 U7.14 U7.15 U7.17 U10.29 U10.30

## Polygon pours and split planes (outlines as drawn)
no net on F.Cu "NONET_L01_P000" (solid, shelved, pour order 0): -70,90 0,90 0,0 -70,0
GND on B.Cu "NONET_L02_P001" (solid, shelved, pour order 1): -70,90 0,90 0,0 -70,0

## Keep-outs
Edge.Cuts:
  lines w0.05: -70,0 0,0 ; -70,0 -70,90 ; -70,0 0,0 ; -70,0 -70,90 ; -70,90 0,90 ; -70,90 0,90 ; 0,0 0,90 ; 0,0 0,90

## Text inside footprints (layer, text, board x,y; h text height)
J1: Dwgs.User "PCB Cutout Area" at -23.44,85.295 h0.81 r180
J2: Dwgs.User "PCB Cutout Area" at -5.66,85.295 h0.81 r180
J3: Dwgs.User "PCB Cutout Area" at -41.474,85.295 h0.81 r180
J4: Dwgs.User "PCB Edge" at -59.768,90.944 h0.61 r180